# Altium PCB main.PcbDoc
Units mm, origin at the board's own origin, x right, y up, seen from the top; angles counter-clockwise.
Board outline 12 x 12 mm, 2 copper layers (Top Layer, Bottom Layer); 64 components, 67 nets, 256 pads, 43 vias.
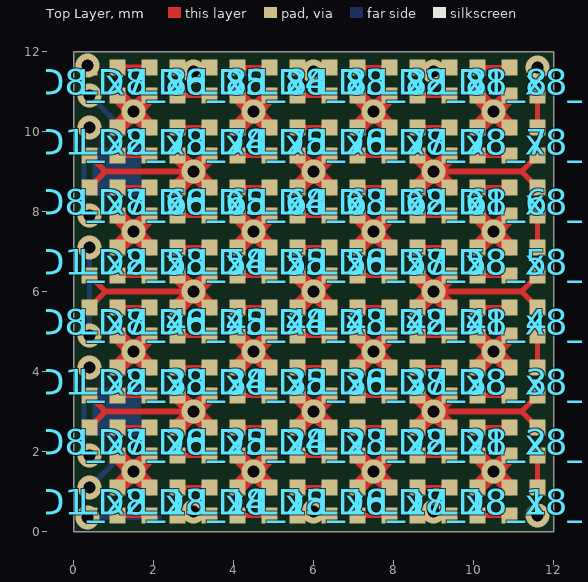
[diagram p0: Top Layer view]
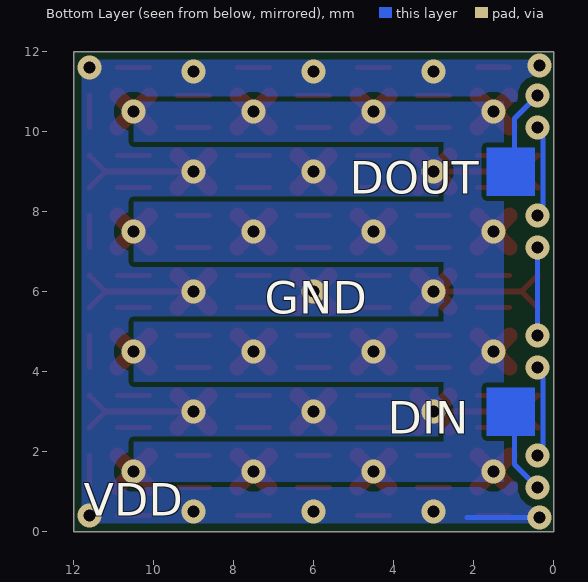
[diagram p1: Bottom Layer view, seen from below]

## Layer stack, top to bottom
Top Solder: solder mask 0.0102, Solder Resist, Dk 3.5
Top Layer: signal copper 0.0356
Dielectric 1: dielectric 0.32, FR-4, Dk 4.8
Bottom Layer: signal copper 0.0356
Bottom Solder: solder mask 0.0102, Solder Resist, Dk 3.5

## Board outline
0,0 12,0 12,12 0,12

## Design rules (kind name [scope] priority, off if disabled: settings)
BoardOutlineClearance JLC_BoardOutlineClearance_Silk [OnLayer('Top Overlay')  or   OnLayer('Bottom Overlay')] p1: gap=0 ignorepadtopadclearanceinfootprint=FALSE
BoardOutlineClearance JLC_BoardOutlineClearance_Single [All] p2: gap=0.4 ignorepadtopadclearanceinfootprint=FALSE except(0: Arc-SplitContinuation Track-SplitContinuation SMDPad-SplitContinuation THPad-SplitContinuation Via-SplitContinuation Fill-SplitContinuation Poly-SplitContinuation Region-SplitContinuation Text-SplitContinuation; 0.2: Arc-OutlineEdge Track-OutlineEdge SMDPad-OutlineEdge THPad-OutlineEdge Via-OutlineEdge Fill-OutlineEdge Poly-OutlineEdge Region-OutlineEdge Text-OutlineEdge)
BoardOutlineClearance JLC_BoardOutlineClearance_Panel [All] p3: gap=0.4 ignorepadtopadclearanceinfootprint=FALSE except(0: Arc-SplitContinuation Track-SplitContinuation SMDPad-SplitContinuation THPad-SplitContinuation Via-SplitContinuation Fill-SplitContinuation Poly-SplitContinuation Region-SplitContinuation Text-SplitContinuation)
Clearance JLC_Clearance_SB [(HasFootprint('0603 Solder Bridge-Footprint-1'))] p1: gap=0.127 ignorepadtopadclearanceinfootprint=FALSE except(0: Fill-Hole Poly-Hole Region-Hole Text-Hole; 0.254: SMDPad-Fill SMDPad-Poly SMDPad-Region THPad-Fill THPad-Poly THPad-Region Via-Fill Via-Poly Via-Region)
Clearance JLC_Clearance_Top [All] p2: gap=0.127 ignorepadtopadclearanceinfootprint=FALSE except(0: Fill-Hole Poly-Hole Region-Hole Text-Hole; 0.2: THPad-Poly THPad-Region Via-Poly Via-Region; 0.254: THPad-Fill Via-Fill)
ComponentClearance JLC_ComponentClearance [All] p1: gap=0 collisioncheckmode=3 verticalgap=0 showdistances=FALSE
ComponentOrientations JLC_ComponentOrientations [All] p1: allowedrotations=32
Height JLC_Height [All] p1: minheight=0 maxheight=2539.975 prefheight=12.7
HoleSize JLC_HoleSize [All] p1: absolutevalues=TRUE maxlimit=6.35 minlimit=0.3 maxpercent=80.000 minpercent=20.000
HoleToHoleClearance JLC_HoleToHoleClearance [All] p1: gap=0.305 allowstackedmicrovias=TRUE
MinimumAnnularRing JLC_MinimumAnnularRing [All] p1: minimumring=0.2
MinimumSolderMaskSliver JLC_MinimumSolderMaskSliver [All] p1: minsoldermaskwidth=0
PolygonConnect [All] p1: connectstyle=Relief reliefconductorwidth=0.254 reliefentries=4 polygonreliefangle="90 Angle" airgapwidth=0.254
RoutingVias JLC_RoutingVias [All] p1: holewidth=0.3 width=0.6 viastyle="Through Hole" minholewidth=0.3 minwidth=0.6 maxholewidth=6.35 maxwidth=10
SilkToSilkClearance JLC_SilkToSilkClearance [All] p1: silktosilkclearance=0
SilkToSolderMaskClearance JLC_SilkToSolderMaskClearance [IsPad] p1: minsilkscreentomaskgap=0 clearancetoexposedcopper=TRUE
SolderMaskExpansion [All] p1: expansion=0.102 istentingtop=FALSE
Width JLC_Width [All] p1: maxlimit=12.7 minlimit=0.127 preferedwidth=0.254
23 further rules are at their usual default settings.

## Classes and differential pairs
channel class 8: x8_1 x8_2 x8_3 x8_4 x8_5 x8_6 x8_7 x8_8
component class x8_8: LD1_x8_8 LD2_x8_8 LD3_x8_8 LD4_x8_8 LD5_x8_8 LD6_x8_8 LD7_x8_8 LD8_x8_8
component class x8_7: LD1_x8_7 LD2_x8_7 LD3_x8_7 LD4_x8_7 LD5_x8_7 LD6_x8_7 LD7_x8_7 LD8_x8_7
component class x8_6: LD1_x8_6 LD2_x8_6 LD3_x8_6 LD4_x8_6 LD5_x8_6 LD6_x8_6 LD7_x8_6 LD8_x8_6
component class x8_5: LD1_x8_5 LD2_x8_5 LD3_x8_5 LD4_x8_5 LD5_x8_5 LD6_x8_5 LD7_x8_5 LD8_x8_5
component class x8_4: LD1_x8_4 LD2_x8_4 LD3_x8_4 LD4_x8_4 LD5_x8_4 LD6_x8_4 LD7_x8_4 LD8_x8_4
component class x8_3: LD1_x8_3 LD2_x8_3 LD3_x8_3 LD4_x8_3 LD5_x8_3 LD6_x8_3 LD7_x8_3 LD8_x8_3
component class x8_2: LD1_x8_2 LD2_x8_2 LD3_x8_2 LD4_x8_2 LD5_x8_2 LD6_x8_2 LD7_x8_2 LD8_x8_2
component class x8_1: LD1_x8_1 LD2_x8_1 LD3_x8_1 LD4_x8_1 LD5_x8_1 LD6_x8_1 LD7_x8_1 LD8_x8_1

## Components (designator, comment, footprint, x,y, rotation, side; value= is the part's Value field where it differs from the comment)
LD1_x8_1 "1515 Addressable LED" "SK6805-EC 15 DENSE" 0.75,0.75 r270 top (schematic designator LD1)
LD1_x8_2 "1515 Addressable LED" "SK6805-EC 15 DENSE" 11.25,2.25 r90 top (schematic designator LD1)
LD1_x8_3 "1515 Addressable LED" "SK6805-EC 15 DENSE" 0.75,3.75 r270 top (schematic designator LD1)
LD1_x8_4 "1515 Addressable LED" "SK6805-EC 15 DENSE" 11.25,5.25 r90 top (schematic designator LD1)
LD1_x8_5 "1515 Addressable LED" "SK6805-EC 15 DENSE" 0.75,6.75 r270 top (schematic designator LD1)
LD1_x8_6 "1515 Addressable LED" "SK6805-EC 15 DENSE" 11.25,8.25 r90 top (schematic designator LD1)
LD1_x8_7 "1515 Addressable LED" "SK6805-EC 15 DENSE" 0.75,9.75 r270 top (schematic designator LD1)
LD1_x8_8 "1515 Addressable LED" "SK6805-EC 15 DENSE" 11.25,11.25 r90 top (schematic designator LD1)
LD2_x8_1 "1515 Addressable LED" "SK6805-EC 15 DENSE" 2.25,0.75 r0 top (schematic designator LD2)
LD2_x8_2 "1515 Addressable LED" "SK6805-EC 15 DENSE" 9.75,2.25 r180 top (schematic designator LD2)
LD2_x8_3 "1515 Addressable LED" "SK6805-EC 15 DENSE" 2.25,3.75 r0 top (schematic designator LD2)
LD2_x8_4 "1515 Addressable LED" "SK6805-EC 15 DENSE" 9.75,5.25 r180 top (schematic designator LD2)
LD2_x8_5 "1515 Addressable LED" "SK6805-EC 15 DENSE" 2.25,6.75 r0 top (schematic designator LD2)
LD2_x8_6 "1515 Addressable LED" "SK6805-EC 15 DENSE" 9.75,8.25 r180 top (schematic designator LD2)
LD2_x8_7 "1515 Addressable LED" "SK6805-EC 15 DENSE" 2.25,9.75 r0 top (schematic designator LD2)
LD2_x8_8 "1515 Addressable LED" "SK6805-EC 15 DENSE" 9.75,11.25 r180 top (schematic designator LD2)
LD3_x8_1 "1515 Addressable LED" "SK6805-EC 15 DENSE" 3.75,0.75 r270 top (schematic designator LD3)
LD3_x8_2 "1515 Addressable LED" "SK6805-EC 15 DENSE" 8.25,2.25 r90 top (schematic designator LD3)
LD3_x8_3 "1515 Addressable LED" "SK6805-EC 15 DENSE" 3.75,3.75 r270 top (schematic designator LD3)
LD3_x8_4 "1515 Addressable LED" "SK6805-EC 15 DENSE" 8.25,5.25 r90 top (schematic designator LD3)
LD3_x8_5 "1515 Addressable LED" "SK6805-EC 15 DENSE" 3.75,6.75 r270 top (schematic designator LD3)
LD3_x8_6 "1515 Addressable LED" "SK6805-EC 15 DENSE" 8.25,8.25 r90 top (schematic designator LD3)
LD3_x8_7 "1515 Addressable LED" "SK6805-EC 15 DENSE" 3.75,9.75 r270 top (schematic designator LD3)
LD3_x8_8 "1515 Addressable LED" "SK6805-EC 15 DENSE" 8.25,11.25 r90 top (schematic designator LD3)
LD4_x8_1 "1515 Addressable LED" "SK6805-EC 15 DENSE" 5.25,0.75 r0 top (schematic designator LD4)
LD4_x8_2 "1515 Addressable LED" "SK6805-EC 15 DENSE" 6.75,2.25 r180 top (schematic designator LD4)
LD4_x8_3 "1515 Addressable LED" "SK6805-EC 15 DENSE" 5.25,3.75 r0 top (schematic designator LD4)
LD4_x8_4 "1515 Addressable LED" "SK6805-EC 15 DENSE" 6.75,5.25 r180 top (schematic designator LD4)
LD4_x8_5 "1515 Addressable LED" "SK6805-EC 15 DENSE" 5.25,6.75 r0 top (schematic designator LD4)
LD4_x8_6 "1515 Addressable LED" "SK6805-EC 15 DENSE" 6.75,8.25 r180 top (schematic designator LD4)
LD4_x8_7 "1515 Addressable LED" "SK6805-EC 15 DENSE" 5.25,9.75 r0 top (schematic designator LD4)
LD4_x8_8 "1515 Addressable LED" "SK6805-EC 15 DENSE" 6.75,11.25 r180 top (schematic designator LD4)
LD5_x8_1 "1515 Addressable LED" "SK6805-EC 15 DENSE" 6.75,0.75 r270 top (schematic designator LD5)
LD5_x8_2 "1515 Addressable LED" "SK6805-EC 15 DENSE" 5.25,2.25 r90 top (schematic designator LD5)
LD5_x8_3 "1515 Addressable LED" "SK6805-EC 15 DENSE" 6.75,3.75 r270 top (schematic designator LD5)
LD5_x8_4 "1515 Addressable LED" "SK6805-EC 15 DENSE" 5.25,5.25 r90 top (schematic designator LD5)
LD5_x8_5 "1515 Addressable LED" "SK6805-EC 15 DENSE" 6.75,6.75 r270 top (schematic designator LD5)
LD5_x8_6 "1515 Addressable LED" "SK6805-EC 15 DENSE" 5.25,8.25 r90 top (schematic designator LD5)
LD5_x8_7 "1515 Addressable LED" "SK6805-EC 15 DENSE" 6.75,9.75 r270 top (schematic designator LD5)
LD5_x8_8 "1515 Addressable LED" "SK6805-EC 15 DENSE" 5.25,11.25 r90 top (schematic designator LD5)
LD6_x8_1 "1515 Addressable LED" "SK6805-EC 15 DENSE" 8.25,0.75 r0 top (schematic designator LD6)
LD6_x8_2 "1515 Addressable LED" "SK6805-EC 15 DENSE" 3.75,2.25 r180 top (schematic designator LD6)
LD6_x8_3 "1515 Addressable LED" "SK6805-EC 15 DENSE" 8.25,3.75 r0 top (schematic designator LD6)
LD6_x8_4 "1515 Addressable LED" "SK6805-EC 15 DENSE" 3.75,5.25 r180 top (schematic designator LD6)
LD6_x8_5 "1515 Addressable LED" "SK6805-EC 15 DENSE" 8.25,6.75 r0 top (schematic designator LD6)
LD6_x8_6 "1515 Addressable LED" "SK6805-EC 15 DENSE" 3.75,8.25 r180 top (schematic designator LD6)
LD6_x8_7 "1515 Addressable LED" "SK6805-EC 15 DENSE" 8.25,9.75 r0 top (schematic designator LD6)
LD6_x8_8 "1515 Addressable LED" "SK6805-EC 15 DENSE" 3.75,11.25 r180 top (schematic designator LD6)
LD7_x8_1 "1515 Addressable LED" "SK6805-EC 15 DENSE" 9.75,0.75 r270 top (schematic designator LD7)
LD7_x8_2 "1515 Addressable LED" "SK6805-EC 15 DENSE" 2.25,2.25 r90 top (schematic designator LD7)
LD7_x8_3 "1515 Addressable LED" "SK6805-EC 15 DENSE" 9.75,3.75 r270 top (schematic designator LD7)
LD7_x8_4 "1515 Addressable LED" "SK6805-EC 15 DENSE" 2.25,5.25 r90 top (schematic designator LD7)
LD7_x8_5 "1515 Addressable LED" "SK6805-EC 15 DENSE" 9.75,6.75 r270 top (schematic designator LD7)
LD7_x8_6 "1515 Addressable LED" "SK6805-EC 15 DENSE" 2.25,8.25 r90 top (schematic designator LD7)
LD7_x8_7 "1515 Addressable LED" "SK6805-EC 15 DENSE" 9.75,9.75 r270 top (schematic designator LD7)
LD7_x8_8 "1515 Addressable LED" "SK6805-EC 15 DENSE" 2.25,11.25 r90 top (schematic designator LD7)
LD8_x8_1 "1515 Addressable LED" "SK6805-EC 15 DENSE" 11.25,0.75 r0 top (schematic designator LD8)
LD8_x8_2 "1515 Addressable LED" "SK6805-EC 15 DENSE" 0.75,2.25 r180 top (schematic designator LD8)
LD8_x8_3 "1515 Addressable LED" "SK6805-EC 15 DENSE" 11.25,3.75 r0 top (schematic designator LD8)
LD8_x8_4 "1515 Addressable LED" "SK6805-EC 15 DENSE" 0.75,5.25 r180 top (schematic designator LD8)
LD8_x8_5 "1515 Addressable LED" "SK6805-EC 15 DENSE" 11.25,6.75 r0 top (schematic designator LD8)
LD8_x8_6 "1515 Addressable LED" "SK6805-EC 15 DENSE" 0.75,8.25 r180 top (schematic designator LD8)
LD8_x8_7 "1515 Addressable LED" "SK6805-EC 15 DENSE" 11.25,9.75 r0 top (schematic designator LD8)
LD8_x8_8 "1515 Addressable LED" "SK6805-EC 15 DENSE" 0.75,11.25 r180 top (schematic designator LD8)

## Footprints (in the part's own frame and the unit in brackets; to place one, negate y for a bottom-side part, rotate by r counter-clockwise, add the part's x,y. Pads: shape width x height; smd on the part's side, far side on the other; paste and mask are expansions set on the pad)
"SK6805-EC 15 DENSE" [mm] "1515 Addr LED"
  rect 0.4x0.4 smd mask+0.05: 1(-0.35,-0.35) 2(0.35,-0.35) 3(0.35,0.35) 4(-0.35,0.35)
  body extent -0.75,-0.75 0.75,0.75, height 0.65

## Part data
LD1_x8_1 LD1_x8_2 LD1_x8_3 LD1_x8_4 LD1_x8_5 LD1_x8_6 LD1_x8_7 LD1_x8_8 LD2_x8_1 LD2_x8_2 LD2_x8_3 LD2_x8_4 LD2_x8_5 LD2_x8_6 LD2_x8_7 LD2_x8_8 LD3_x8_1 LD3_x8_2 LD3_x8_3 LD3_x8_4 LD3_x8_5 LD3_x8_6 LD3_x8_7 LD3_x8_8 LD4_x8_1 LD4_x8_2 LD4_x8_3 LD4_x8_4 LD4_x8_5 LD4_x8_6 LD4_x8_7 LD4_x8_8 LD5_x8_1 LD5_x8_2 LD5_x8_3 LD5_x8_4 LD5_x8_5 LD5_x8_6 LD5_x8_7 LD5_x8_8 LD6_x8_1 LD6_x8_2 LD6_x8_3 LD6_x8_4 LD6_x8_5 LD6_x8_6 LD6_x8_7 LD6_x8_8 LD7_x8_1 LD7_x8_2 LD7_x8_3 LD7_x8_4 LD7_x8_5 LD7_x8_6 LD7_x8_7 LD7_x8_8 LD8_x8_1 LD8_x8_2 LD8_x8_3 LD8_x8_4 LD8_x8_5 LD8_x8_6 LD8_x8_7 LD8_x8_8: library part "SK6805-EC 15"

## Via types
v1: diameter 0.6, hole 0.3, Top Layer to Bottom Layer, tented both sides, 43 vias

## Nets (pads, with @x,y where several pads share a name; then routed paths per layer and width w, separated by ;. In a path a pad name is that pad's centre, name@x,y a point inside that pad or via, vN(x,y) a via of type N, cw(c..) or ccw(c..) an arc to the next point about the centre after c; other vN are vias at no path point)
DIN_x8_1: LD1_x8_1.1 | length 2.1
  Bottom Layer w0.127: v1(0.4,1.1) 0.975,1.675 0.975,3
DIN_x8_2: LD1_x8_2.1 LD8_x8_1.3 | length 0.8
  Top Layer w0.127: LD8_x8_1.3 LD1_x8_2.1
DIN_x8_3: LD1_x8_3.1 LD8_x8_2.3 | length 2.3
  Bottom Layer w0.127: v1(0.4,1.9) 0.4,2.028 0.263,2.165 0.263,3.836 0.4,3.972 v1(0.4,4.1)
DIN_x8_4: LD1_x8_4.1 LD8_x8_3.3 | length 0.8
  Top Layer w0.127: LD8_x8_3.3 LD1_x8_4.1
DIN_x8_5: LD1_x8_5.1 LD8_x8_4.3 | length 2.2
  Bottom Layer w0.127: v1(0.4,4.9) v1(0.4,7.1)
DIN_x8_6: LD1_x8_6.1 LD8_x8_5.3 | length 0.8
  Top Layer w0.127: LD8_x8_5.3 LD1_x8_6.1
DIN_x8_7: LD1_x8_7.1 LD8_x8_6.3 | length 2.3
  Bottom Layer w0.127: v1(0.4,7.9) 0.4,8.028 0.263,8.165 0.263,9.835 0.4,9.972 v1(0.4,10.1)
DIN_x8_8: LD1_x8_8.1 LD8_x8_7.3 | length 0.8
  Top Layer w0.127: LD8_x8_7.3 LD1_x8_8.1
DOUT_x8_8: LD8_x8_8.3 | length 2.1
  Bottom Layer w0.127: v1(0.4,10.9) 0.975,10.325 0.975,9
GND: LD1_x8_1.4 LD1_x8_2.4 LD1_x8_3.4 LD1_x8_4.4 LD1_x8_5.4 LD1_x8_6.4 LD1_x8_7.4 LD1_x8_8.4 LD2_x8_1.4 LD2_x8_2.4 LD2_x8_3.4 LD2_x8_4.4 LD2_x8_5.4 LD2_x8_6.4 LD2_x8_7.4 LD2_x8_8.4 LD3_x8_1.4 LD3_x8_2.4 LD3_x8_3.4 LD3_x8_4.4 LD3_x8_5.4 LD3_x8_6.4 LD3_x8_7.4 LD3_x8_8.4 LD4_x8_1.4 LD4_x8_2.4 LD4_x8_3.4 LD4_x8_4.4 LD4_x8_5.4 LD4_x8_6.4 LD4_x8_7.4 LD4_x8_8.4 LD5_x8_1.4 LD5_x8_2.4 LD5_x8_3.4 LD5_x8_4.4 LD5_x8_5.4 LD5_x8_6.4 LD5_x8_7.4 LD5_x8_8.4 LD6_x8_1.4 LD6_x8_2.4 LD6_x8_3.4 LD6_x8_4.4 LD6_x8_5.4 LD6_x8_6.4 LD6_x8_7.4 LD6_x8_8.4 LD7_x8_1.4 LD7_x8_2.4 LD7_x8_3.4 LD7_x8_4.4 LD7_x8_5.4 LD7_x8_6.4 LD7_x8_7.4 LD7_x8_8.4 LD8_x8_1.4 LD8_x8_2.4 LD8_x8_3.4 LD8_x8_4.4 LD8_x8_5.4 LD8_x8_6.4 LD8_x8_7.4 LD8_x8_8.4 | length 36.2
  Top Layer w0.4: LD1_x8_1.4 v1(1.5,1.5) ; LD8_x8_2.4 v1(1.5,1.5) ; LD1_x8_3.4 v1(1.5,4.5) ; LD8_x8_4.4 v1(1.5,4.5) ; LD1_x8_5.4 v1(1.5,7.5) ; LD8_x8_6.4 v1(1.5,7.5) ; LD1_x8_7.4 v1(1.5,10.5) ; LD8_x8_8.4 v1(1.5,10.5) ; v1(1.5,4.5) LD2_x8_3.4 ; LD2_x8_1.4 v1(1.5,1.5) ; LD7_x8_2.4 v1(1.5,1.5) ; LD7_x8_4.4 v1(1.5,4.5) ; LD2_x8_5.4 v1(1.5,7.5) ; LD7_x8_6.4 v1(1.5,7.5) ; LD2_x8_7.4 v1(1.5,10.5) ; LD7_x8_8.4 v1(1.5,10.5) ; LD3_x8_1.4 v1(4.5,1.5) ; LD6_x8_2.4 v1(4.5,1.5) ; LD3_x8_3.4 v1(4.5,4.5) ; LD6_x8_4.4 v1(4.5,4.5) ; LD3_x8_5.4 v1(4.5,7.5) ; LD6_x8_6.4 v1(4.5,7.5) ; LD3_x8_7.4 v1(4.5,10.5) ; LD6_x8_8.4 v1(4.5,10.5) ; v1(4.5,4.5) LD4_x8_3.4 ; LD4_x8_1.4 v1(4.5,1.5) ; LD5_x8_2.4 v1(4.5,1.5) ; LD5_x8_4.4 v1(4.5,4.5) ; LD4_x8_5.4 v1(4.5,7.5) ; LD5_x8_6.4 v1(4.5,7.5) ; LD4_x8_7.4 v1(4.5,10.5) ; LD5_x8_8.4 v1(4.5,10.5) ; LD5_x8_1.4 v1(7.5,1.5) ; LD4_x8_2.4 v1(7.5,1.5) ; LD5_x8_3.4 v1(7.5,4.5) ; LD4_x8_4.4 v1(7.5,4.5) ; LD5_x8_5.4 v1(7.5,7.5) ; LD4_x8_6.4 v1(7.5,7.5) ; LD5_x8_7.4 v1(7.5,10.5) ; LD4_x8_8.4 v1(7.5,10.5) ; v1(7.5,4.5) LD6_x8_3.4 ; LD6_x8_1.4 v1(7.5,1.5) ; LD3_x8_2.4 v1(7.5,1.5) ; LD3_x8_4.4 v1(7.5,4.5) ; LD6_x8_5.4 v1(7.5,7.5) ; LD3_x8_6.4 v1(7.5,7.5) ; LD6_x8_7.4 v1(7.5,10.5) ; LD3_x8_8.4 v1(7.5,10.5) ; LD7_x8_1.4 v1(10.5,1.5) ; LD2_x8_2.4 v1(10.5,1.5) ; LD7_x8_3.4 v1(10.5,4.5) ; LD2_x8_4.4 v1(10.5,4.5) ; LD7_x8_5.4 v1(10.5,7.5) ; LD2_x8_6.4 v1(10.5,7.5) ; LD7_x8_7.4 v1(10.5,10.5) ; LD2_x8_8.4 v1(10.5,10.5) ; v1(10.5,4.5) LD8_x8_3.4 ; LD8_x8_1.4 v1(10.5,1.5) ; LD1_x8_2.4 v1(10.5,1.5) ; LD1_x8_4.4 v1(10.5,4.5) ; LD8_x8_5.4 v1(10.5,7.5) ; LD1_x8_6.4 v1(10.5,7.5) ; LD8_x8_7.4 v1(10.5,10.5) ; LD1_x8_8.4 v1(10.5,10.5)
NetLD1_x8_1_3: LD1_x8_1.3 LD2_x8_1.1 | length 0.8
  Top Layer w0.127: LD1_x8_1.3 LD2_x8_1.1
NetLD1_x8_2_3: LD1_x8_2.3 LD2_x8_2.1 | length 0.8
  Top Layer w0.127: LD2_x8_2.1 LD1_x8_2.3
NetLD1_x8_3_3: LD1_x8_3.3 LD2_x8_3.1 | length 0.8
  Top Layer w0.127: LD1_x8_3.3 LD2_x8_3.1
NetLD1_x8_4_3: LD1_x8_4.3 LD2_x8_4.1 | length 0.8
  Top Layer w0.127: LD2_x8_4.1 LD1_x8_4.3
NetLD1_x8_5_3: LD1_x8_5.3 LD2_x8_5.1 | length 0.8
  Top Layer w0.127: LD1_x8_5.3 LD2_x8_5.1
NetLD1_x8_6_3: LD1_x8_6.3 LD2_x8_6.1 | length 0.8
  Top Layer w0.127: LD2_x8_6.1 LD1_x8_6.3
NetLD1_x8_7_3: LD1_x8_7.3 LD2_x8_7.1 | length 0.8
  Top Layer w0.127: LD1_x8_7.3 LD2_x8_7.1
NetLD1_x8_8_3: LD1_x8_8.3 LD2_x8_8.1 | length 0.8
  Top Layer w0.127: LD2_x8_8.1 LD1_x8_8.3
NetLD2_x8_1_3: LD2_x8_1.3 LD3_x8_1.1 | length 0.8
  Top Layer w0.127: LD2_x8_1.3 LD3_x8_1.1
NetLD2_x8_2_3: LD2_x8_2.3 LD3_x8_2.1 | length 0.8
  Top Layer w0.127: LD3_x8_2.1 LD2_x8_2.3
NetLD2_x8_3_3: LD2_x8_3.3 LD3_x8_3.1 | length 0.8
  Top Layer w0.127: LD2_x8_3.3 LD3_x8_3.1
NetLD2_x8_4_3: LD2_x8_4.3 LD3_x8_4.1 | length 0.8
  Top Layer w0.127: LD3_x8_4.1 LD2_x8_4.3
NetLD2_x8_5_3: LD2_x8_5.3 LD3_x8_5.1 | length 0.8
  Top Layer w0.127: LD2_x8_5.3 LD3_x8_5.1
NetLD2_x8_6_3: LD2_x8_6.3 LD3_x8_6.1 | length 0.8
  Top Layer w0.127: LD3_x8_6.1 LD2_x8_6.3
NetLD2_x8_7_3: LD2_x8_7.3 LD3_x8_7.1 | length 0.8
  Top Layer w0.127: LD2_x8_7.3 LD3_x8_7.1
NetLD2_x8_8_3: LD2_x8_8.3 LD3_x8_8.1 | length 0.8
  Top Layer w0.127: LD3_x8_8.1 LD2_x8_8.3
NetLD3_x8_1_3: LD3_x8_1.3 LD4_x8_1.1 | length 0.8
  Top Layer w0.127: LD3_x8_1.3 LD4_x8_1.1
NetLD3_x8_2_3: LD3_x8_2.3 LD4_x8_2.1 | length 0.8
  Top Layer w0.127: LD4_x8_2.1 LD3_x8_2.3
NetLD3_x8_3_3: LD3_x8_3.3 LD4_x8_3.1 | length 0.8
  Top Layer w0.127: LD3_x8_3.3 LD4_x8_3.1
NetLD3_x8_4_3: LD3_x8_4.3 LD4_x8_4.1 | length 0.8
  Top Layer w0.127: LD4_x8_4.1 LD3_x8_4.3
NetLD3_x8_5_3: LD3_x8_5.3 LD4_x8_5.1 | length 0.8
  Top Layer w0.127: LD3_x8_5.3 LD4_x8_5.1
NetLD3_x8_6_3: LD3_x8_6.3 LD4_x8_6.1 | length 0.8
  Top Layer w0.127: LD4_x8_6.1 LD3_x8_6.3
NetLD3_x8_7_3: LD3_x8_7.3 LD4_x8_7.1 | length 0.8
  Top Layer w0.127: LD3_x8_7.3 LD4_x8_7.1
NetLD3_x8_8_3: LD3_x8_8.3 LD4_x8_8.1 | length 0.8
  Top Layer w0.127: LD4_x8_8.1 LD3_x8_8.3
NetLD4_x8_1_3: LD4_x8_1.3 LD5_x8_1.1 | length 0.8
  Top Layer w0.127: LD4_x8_1.3 LD5_x8_1.1
NetLD4_x8_2_3: LD4_x8_2.3 LD5_x8_2.1 | length 0.8
  Top Layer w0.127: LD5_x8_2.1 LD4_x8_2.3
NetLD4_x8_3_3: LD4_x8_3.3 LD5_x8_3.1 | length 0.8
  Top Layer w0.127: LD4_x8_3.3 LD5_x8_3.1
NetLD4_x8_4_3: LD4_x8_4.3 LD5_x8_4.1 | length 0.8
  Top Layer w0.127: LD5_x8_4.1 LD4_x8_4.3
NetLD4_x8_5_3: LD4_x8_5.3 LD5_x8_5.1 | length 0.8
  Top Layer w0.127: LD4_x8_5.3 LD5_x8_5.1
NetLD4_x8_6_3: LD4_x8_6.3 LD5_x8_6.1 | length 0.8
  Top Layer w0.127: LD5_x8_6.1 LD4_x8_6.3
NetLD4_x8_7_3: LD4_x8_7.3 LD5_x8_7.1 | length 0.8
  Top Layer w0.127: LD4_x8_7.3 LD5_x8_7.1
NetLD4_x8_8_3: LD4_x8_8.3 LD5_x8_8.1 | length 0.8
  Top Layer w0.127: LD5_x8_8.1 LD4_x8_8.3
NetLD5_x8_1_3: LD5_x8_1.3 LD6_x8_1.1 | length 0.8
  Top Layer w0.127: LD5_x8_1.3 LD6_x8_1.1
NetLD5_x8_2_3: LD5_x8_2.3 LD6_x8_2.1 | length 0.8
  Top Layer w0.127: LD6_x8_2.1 LD5_x8_2.3
NetLD5_x8_3_3: LD5_x8_3.3 LD6_x8_3.1 | length 0.8
  Top Layer w0.127: LD5_x8_3.3 LD6_x8_3.1
NetLD5_x8_4_3: LD5_x8_4.3 LD6_x8_4.1 | length 0.8
  Top Layer w0.127: LD6_x8_4.1 LD5_x8_4.3
NetLD5_x8_5_3: LD5_x8_5.3 LD6_x8_5.1 | length 0.8
  Top Layer w0.127: LD5_x8_5.3 LD6_x8_5.1
NetLD5_x8_6_3: LD5_x8_6.3 LD6_x8_6.1 | length 0.8
  Top Layer w0.127: LD6_x8_6.1 LD5_x8_6.3
NetLD5_x8_7_3: LD5_x8_7.3 LD6_x8_7.1 | length 0.8
  Top Layer w0.127: LD5_x8_7.3 LD6_x8_7.1
NetLD5_x8_8_3: LD5_x8_8.3 LD6_x8_8.1 | length 0.8
  Top Layer w0.127: LD6_x8_8.1 LD5_x8_8.3
NetLD6_x8_1_3: LD6_x8_1.3 LD7_x8_1.1 | length 0.8
  Top Layer w0.127: LD6_x8_1.3 LD7_x8_1.1
NetLD6_x8_2_3: LD6_x8_2.3 LD7_x8_2.1 | length 0.8
  Top Layer w0.127: LD7_x8_2.1 LD6_x8_2.3
NetLD6_x8_3_3: LD6_x8_3.3 LD7_x8_3.1 | length 0.8
  Top Layer w0.127: LD6_x8_3.3 LD7_x8_3.1
NetLD6_x8_4_3: LD6_x8_4.3 LD7_x8_4.1 | length 0.8
  Top Layer w0.127: LD7_x8_4.1 LD6_x8_4.3
NetLD6_x8_5_3: LD6_x8_5.3 LD7_x8_5.1 | length 0.8
  Top Layer w0.127: LD6_x8_5.3 LD7_x8_5.1
NetLD6_x8_6_3: LD6_x8_6.3 LD7_x8_6.1 | length 0.8
  Top Layer w0.127: LD7_x8_6.1 LD6_x8_6.3
NetLD6_x8_7_3: LD6_x8_7.3 LD7_x8_7.1 | length 0.8
  Top Layer w0.127: LD6_x8_7.3 LD7_x8_7.1
NetLD6_x8_8_3: LD6_x8_8.3 LD7_x8_8.1 | length 0.8
  Top Layer w0.127: LD7_x8_8.1 LD6_x8_8.3
NetLD7_x8_1_3: LD7_x8_1.3 LD8_x8_1.1 | length 0.8
  Top Layer w0.127: LD7_x8_1.3 LD8_x8_1.1
NetLD7_x8_2_3: LD7_x8_2.3 LD8_x8_2.1 | length 0.8
  Top Layer w0.127: LD8_x8_2.1 LD7_x8_2.3
NetLD7_x8_3_3: LD7_x8_3.3 LD8_x8_3.1 | length 0.8
  Top Layer w0.127: LD7_x8_3.3 LD8_x8_3.1
NetLD7_x8_4_3: LD7_x8_4.3 LD8_x8_4.1 | length 0.8
  Top Layer w0.127: LD8_x8_4.1 LD7_x8_4.3
NetLD7_x8_5_3: LD7_x8_5.3 LD8_x8_5.1 | length 0.8
  Top Layer w0.127: LD7_x8_5.3 LD8_x8_5.1
NetLD7_x8_6_3: LD7_x8_6.3 LD8_x8_6.1 | length 0.8
  Top Layer w0.127: LD8_x8_6.1 LD7_x8_6.3
NetLD7_x8_7_3: LD7_x8_7.3 LD8_x8_7.1 | length 0.8
  Top Layer w0.127: LD7_x8_7.3 LD8_x8_7.1
NetLD7_x8_8_3: LD7_x8_8.3 LD8_x8_8.1 | length 0.8
  Top Layer w0.127: LD8_x8_8.1 1.108,11.608 1.892,11.608 LD7_x8_8.3
VDD: LD1_x8_1.2 LD1_x8_2.2 LD1_x8_3.2 LD1_x8_4.2 LD1_x8_5.2 LD1_x8_6.2 LD1_x8_7.2 LD1_x8_8.2 LD2_x8_1.2 LD2_x8_2.2 LD2_x8_3.2 LD2_x8_4.2 LD2_x8_5.2 LD2_x8_6.2 LD2_x8_7.2 LD2_x8_8.2 LD3_x8_1.2 LD3_x8_2.2 LD3_x8_3.2 LD3_x8_4.2 LD3_x8_5.2 LD3_x8_6.2 LD3_x8_7.2 LD3_x8_8.2 LD4_x8_1.2 LD4_x8_2.2 LD4_x8_3.2 LD4_x8_4.2 LD4_x8_5.2 LD4_x8_6.2 LD4_x8_7.2 LD4_x8_8.2 LD5_x8_1.2 LD5_x8_2.2 LD5_x8_3.2 LD5_x8_4.2 LD5_x8_5.2 LD5_x8_6.2 LD5_x8_7.2 LD5_x8_8.2 LD6_x8_1.2 LD6_x8_2.2 LD6_x8_3.2 LD6_x8_4.2 LD6_x8_5.2 LD6_x8_6.2 LD6_x8_7.2 LD6_x8_8.2 LD7_x8_1.2 LD7_x8_2.2 LD7_x8_3.2 LD7_x8_4.2 LD7_x8_5.2 LD7_x8_6.2 LD7_x8_7.2 LD7_x8_8.2 LD8_x8_1.2 LD8_x8_2.2 LD8_x8_3.2 LD8_x8_4.2 LD8_x8_5.2 LD8_x8_6.2 LD8_x8_7.2 LD8_x8_8.2 | length 43.3
  Top Layer w0.127: LD8_x8_2.2 0.8,3 LD1_x8_3.2
  Top Layer w0.145: 0.8,3 v1(3,3) ; 0.8,6 v1(3,6) ; 0.8,9 v1(3,9) ; v1(9,3) 11.2,3 ; v1(9,6) 11.2,6 ; v1(9,9) 11.2,9
  Top Layer w0.15: LD8_x8_2.2 0.8,3 LD1_x8_3.2 ; LD8_x8_4.2 0.8,6 LD1_x8_5.2 ; LD8_x8_6.2 0.8,9 LD1_x8_7.2 ; LD1_x8_2.2 11.2,3 LD8_x8_3.2 ; LD1_x8_4.2 11.2,6 LD8_x8_5.2 ; LD1_x8_6.2 11.2,9 LD8_x8_7.2
  Top Layer w0.4: LD7_x8_2.2 v1(3,3) ; LD2_x8_3.2 v1(3,3) ; LD7_x8_4.2 v1(3,6) ; LD2_x8_5.2 v1(3,6) ; LD7_x8_6.2 v1(3,9) ; LD2_x8_7.2 v1(3,9) ; LD6_x8_2.2 v1(3,3) ; LD3_x8_3.2 v1(3,3) ; LD6_x8_4.2 v1(3,6) ; LD3_x8_5.2 v1(3,6) ; LD6_x8_6.2 v1(3,9) ; LD3_x8_7.2 v1(3,9) ; LD5_x8_2.2 v1(6,3) ; LD4_x8_3.2 v1(6,3) ; LD5_x8_4.2 v1(6,6) ; LD4_x8_5.2 v1(6,6) ; LD5_x8_6.2 v1(6,9) ; LD4_x8_7.2 v1(6,9) ; LD4_x8_2.2 v1(6,3) ; LD5_x8_3.2 v1(6,3) ; LD4_x8_4.2 v1(6,6) ; LD5_x8_5.2 v1(6,6) ; LD4_x8_6.2 v1(6,9) ; LD5_x8_7.2 v1(6,9) ; LD3_x8_2.2 v1(9,3) ; LD6_x8_3.2 v1(9,3) ; LD3_x8_4.2 v1(9,6) ; LD6_x8_5.2 v1(9,6) ; LD3_x8_6.2 v1(9,9) ; LD6_x8_7.2 v1(9,9) ; LD2_x8_2.2 v1(9,3) ; LD7_x8_3.2 v1(9,3) ; LD2_x8_4.2 v1(9,6) ; LD7_x8_5.2 v1(9,6) ; LD2_x8_6.2 v1(9,9) ; LD7_x8_7.2 v1(9,9)
  Bottom Layer w0.127: v1(0.35,0.35) 2.164,0.35
  other v1: 11.6,0.4 3,0.5 6,0.5 9,0.5 3,11.5 6,11.5 9,11.5 11.6,11.6 0.35,11.65

## Polygon pours and split planes (outlines as drawn)
GND on Bottom Layer "GND_L02_P001" (solid, remove dead copper, pour order 1): 1.25,10.75 10.5,10.75 10.5,9.75 2.75,9.75 2.75,8.25 10.5,8.25 10.5,6.75 2.75,6.75 2.75,5.25 10.5,5.25 10.5,3.75 2.75,3.75 2.75,2.25 10.5,2.25 10.5,1.25 1.25,1.25
VDD on Bottom Layer "VDD_L02_P002" (solid, remove dead copper, pour order 2): 0,12 0,10.75 10.5,10.75 10.5,9.75 2.75,9.75 2.75,8.25 10.5,8.25 10.5,6.75 2.75,6.75 2.75,5.25 10.5,5.25 10.5,3.75 2.75,3.75 2.75,2.25 10.5,2.25 10.5,1.25 0,1.25 0,0 12,0 12,12

## Other copper
Bottom Layer:
  region net DOUT_x8_8: 0.475,9.6 0.475,8.4 1.675,8.4 1.675,9.6
  region net DIN_x8_1: 0.475,3.6 0.475,2.4 1.675,2.4 1.675,3.6

## Silkscreen, mask and mechanical layers (free items; w line width, h text height)
Bottom Overlay:
  text "DOUT" at 5.1,8.441 h0.81
  text "GND" at 7.225,5.441 h0.81
  text "DIN" at 4.15,2.441 h0.81
  text "VDD" at 11.75,0.391 h0.81
Bottom Solder:
  region: 6.625,10.775 6.625,9.725 5.375,9.725 5.375,10.775
  region: 6.625,2.275 6.625,1.225 5.375,1.225 5.375,2.275
  region: 11.125,3.625 11.125,2.375 9.875,2.375 9.875,3.625
  region: 11.125,9.625 11.125,8.375 9.875,8.375 9.875,9.625
  region: 11.125,6.625 11.125,5.375 9.875,5.375 9.875,6.625
  region: 6.625,5.125 6.625,3.875 5.375,3.875 5.375,5.125
  region: 6.625,8.125 6.625,6.875 5.375,6.875 5.375,8.125
  region: 1.7,9.625 1.7,8.375 0.45,8.375 0.45,9.625
  region: 1.7,3.625 1.7,2.375 0.45,2.375 0.45,3.625
Mechanical 1:
  the board outline again, w0.2